# Altium PCB Buck_Converter.PcbDoc (part 2 of 2)
Units mm, origin at the board's own origin, x right, y up, seen from the top; angles counter-clockwise.
Board outline 33.25 x 45.75 mm, 2 copper layers (Top Layer, Bottom Layer); 30 components, 13 nets, 71 pads, 22 vias.
Unrouted connection lines stored in the file: 25.
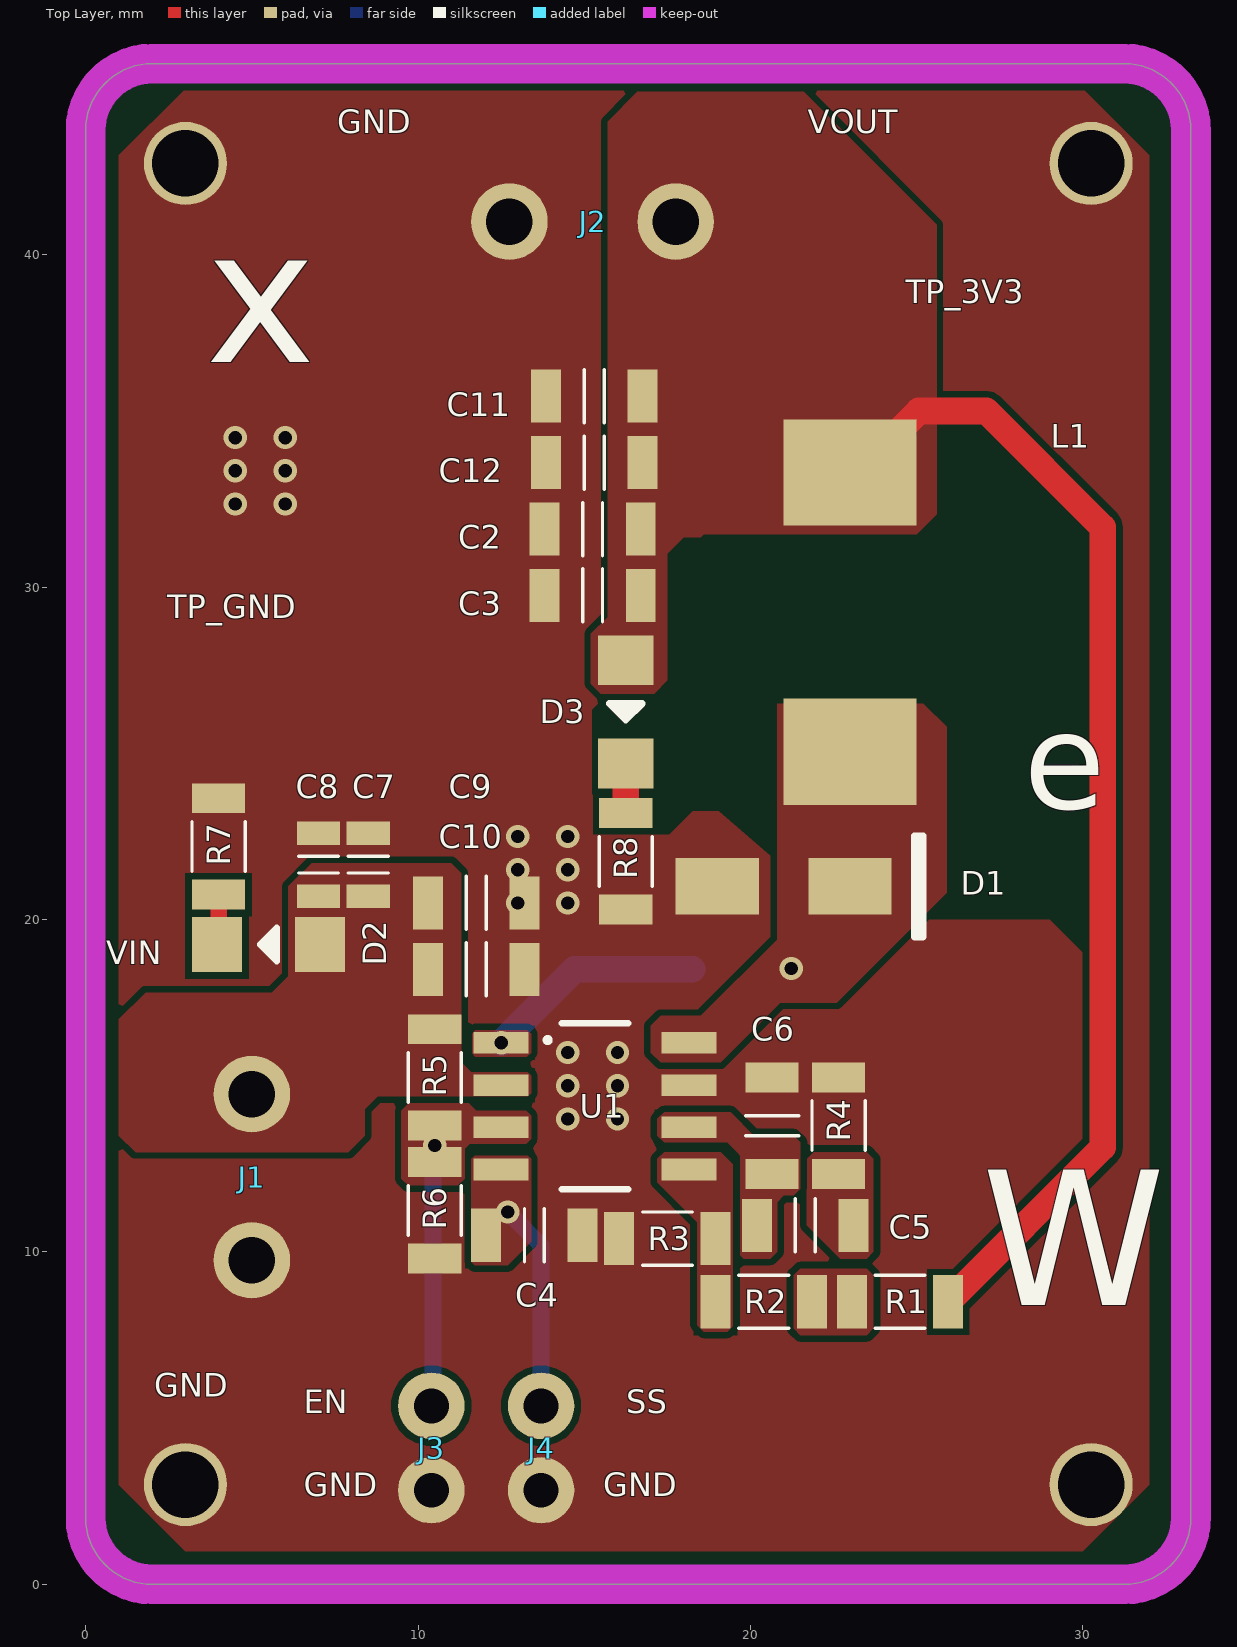
[diagram p0: Top Layer view]

## Part data (continued)
R5: library part "RES 100K OHM 1206 1/4W", "SMD Chip Resistor, 100 kOhm, ï¿½ 5%, 250 mW, 1206 [3216 Metric], Thick Film, General Purpose", Manufacturer=Yageo, Resistance=100kR, Supplier Part Number 1=9240764, Voltage Rating (AC)=200V, Category="Chip SMD Resistors", ComponentLink1Description=https://datasheet.ciiva.com/2458/pyu-rc1206-51-rohs-l-4-2458650.pdf?src-supplier=Digikey, ComponentLink1URL=https://datasheet.ciiva.com/2458/pyu-rc1206-51-rohs-l-4-2458650.pdf?src-supplier=Digikey, ComponentLink2Description=https://datasheet.ciiva.com/7857/444357-7857423.pdf?src-supplier=Element14, ComponentLink2URL=https://datasheet.ciiva.com/7857/444357-7857423.pdf?src-supplier=Element14, ComponentLink3Description=https://datasheet.ciiva.com/2458/pyu-rc1206-51-rohs-l-4-2458651.pdf?src-supplier=Digikey, ComponentLink3URL=https://datasheet.ciiva.com/2458/pyu-rc1206-51-rohs-l-4-2458651.pdf?src-supplier=Digikey, ComponentLink4Description=https://datasheet.ciiva.com/2458/pyu-rc1206-51-rohs-l-4-2458652.pdf?src-supplier=Digikey, ComponentLink4URL=https://datasheet.ciiva.com/2458/pyu-rc1206-51-rohs-l-4-2458652.pdf?src-supplier=Digikey, DesignedBy="Aslı Kurt", Lead Free=5697LeadFree, Manufacturer Part Number=RC1206JR-07100KL, Pricing 1="10=0,0133, 100=0,0123, 500=0,0111, 1000=0,0104, 2500=0,0095 (EUR)", Pricing 2="5000=0,0029, 25000=0,0027, 100000=0,0026, 250000=0,0026, 625000=0,0024 (USD)", Pricing 3="5000=0,00353, 10000=0,00345, 20000=0,00338, 30000=0,00331, 40000=0,00325 (USD)", Pricing 4="1=0,1, 10=0,014, 50=0,014, 100=0,013, 1000=0,011, 10000=0,004 (USD)", Pricing 5="5000=0,004 (USD)", RoHS=Yes, Stock 1=3980, Stock 2=470000, Stock 3=5000, Stock 4=41748, Stock 5=55000, Supplier 1=Farnell, Supplier 2="Future Electronics", Supplier 3=Avnet, Supplier 4=Mouser, Supplier 5=Newark, Supplier Part Number 2=4725842, Supplier Part Number 3=RC1206JR-07100KL, Supplier Part Number 4=603-RC1206JR-07100KL, Supplier Part Number 5=12AC2282
R6: library part "RES 47K OHM 1206 1/4W", "SMD Chip Resistor, 47 kOhm, ï¿½ 5%, 250 mW, 1206 [3216 Metric], Thick Film, General Purpose", Manufacturer=Yageo, Manufacturer Part Number=RC1206JR-0747KL, Resistance=47kR, Supplier Part Number 1=9240721, Voltage Rating (AC)=200V, Category="Chip SMD Resistors", ComponentLink1Description=https://datasheet.ciiva.com/29181/402745-da-01-en-smd-widerstand-chip1206-47-kohm-29181385.pdf?src-supplier=Conrad, ComponentLink1URL=https://datasheet.ciiva.com/29181/402745-da-01-en-smd-widerstand-chip1206-47-kohm-29181385.pdf?src-supplier=Conrad, ComponentLink2Description=https://datasheet.ciiva.com/2520/pyu-r-int-thick-7-2520698.pdf?src-supplier=Digikey, ComponentLink2URL=https://datasheet.ciiva.com/2520/pyu-r-int-thick-7-2520698.pdf?src-supplier=Digikey, ComponentLink3Description=https://datasheet.ciiva.com/2520/pyu-r-int-thick-7-2520699.pdf?src-supplier=Digikey, ComponentLink3URL=https://datasheet.ciiva.com/2520/pyu-r-int-thick-7-2520699.pdf?src-supplier=Digikey, ComponentLink4Description=https://datasheet.ciiva.com/2520/pyu-r-int-thick-7-2520700.pdf?src-supplier=Digikey, ComponentLink4URL=https://datasheet.ciiva.com/2520/pyu-r-int-thick-7-2520700.pdf?src-supplier=Digikey, ComponentLink5Description=https://datasheet.ciiva.com/16740/pyu-rc1206-51-rohs-l-4-16740793.pdf?src-supplier=Future+Electronics, ComponentLink5URL=https://datasheet.ciiva.com/16740/pyu-rc1206-51-rohs-l-4-16740793.pdf?src-supplier=Future+Electronics, DesignedBy="Aslı Kurt", Pricing 1="10=0,0143, 100=0,0133, 500=0,0114, 1000=0,0095, 2500=0,0093 (EUR)", Pricing 2="5000=0,00353, 30000=0,00331, 40000=0,00325 (USD)", Pricing 3="100=0,008, 1000=0,007, 2000=0,006 (GBP)", Pricing 4="1=0,005, 25=0,005, 50=0,005, 100=0,005, 250=0,005, 500=0,005, 1000=0,005 (USD)", RoHS=Yes, Stock 1=117, Stock 2=65000, Stock 3=4400, Stock 4=9045, Supplier 1=Farnell, Supplier 2=Avnet, Supplier 3=Rs, Supplier 4=Newark, Supplier Part Number 2=RC1206JR-0747KL, Supplier Part Number 3=2427219, Supplier Part Number 4=49AK3906
R7 R8: library part "RES 10K OHM 1206 1/4W", "RES 10K OHM 5% 1/4W 1206", Case Code (Metric)=3216, Case Code (Imperial)=1206, Manufacturer=Yageo, Max Operating Temperature=155°C, Max Power Dissipation=250mW, Min Operating Temperature=-55°C, Package Quantity=1, Resistance=10kR, Resistance Tolerance=5%, Resistor Type="Thick Film", Supplier Part Number 1=4750733, Temperature Coefficient=100ppm/°C, Voltage Rating=200V, Case/Package=1206, Category="Chip SMD Resistors", ComponentLink1Description=https://datasheet.ciiva.com/29154/402664-da-01-en-smd-widerstand-chip1206-10-kohm-29154546.pdf?src-supplier=Conrad, ComponentLink1URL=https://datasheet.ciiva.com/29154/402664-da-01-en-smd-widerstand-chip1206-10-kohm-29154546.pdf?src-supplier=Conrad, ComponentLink2Description=https://datasheet.ciiva.com/7983/444357-7983813.pdf?src-supplier=Element14, ComponentLink2URL=https://datasheet.ciiva.com/7983/444357-7983813.pdf?src-supplier=Element14, ComponentLink3Description=https://datasheet.ciiva.com/2458/pyu-rc1206-51-rohs-l-4-2458636.pdf?src-supplier=Digikey, ComponentLink3URL=https://datasheet.ciiva.com/2458/pyu-rc1206-51-rohs-l-4-2458636.pdf?src-supplier=Digikey, ComponentLink4Description=https://datasheet.ciiva.com/2458/pyu-rc1206-51-rohs-l-4-2458637.pdf?src-supplier=Digikey, ComponentLink4URL=https://datasheet.ciiva.com/2458/pyu-rc1206-51-rohs-l-4-2458637.pdf?src-supplier=Digikey, ComponentLink5Description=https://datasheet.ciiva.com/2458/pyu-rc1206-51-rohs-l-4-2458635.pdf?src-supplier=Digikey, ComponentLink5URL=https://datasheet.ciiva.com/2458/pyu-rc1206-51-rohs-l-4-2458635.pdf?src-supplier=Digikey, DesignedBy="Aslı Kurt", Height=0.026inch, Lead Free="Lead Free", Length=0.122inch, Manufacturer Part Number=RC1206JR-0710KL, Number of Terminations=2, Packaging="Cut Tape", Power Rating=250mW, Pricing 1="5000=0,0034, 20000=0,0033, 75000=0,0031, 200000=0,003, 500000=0,0029 (USD)", Pricing 2="1=0,1, 10=0,024, 50=0,022, 100=0,0194, 500=0,01224, 1000=0,0102 (USD)", Reach SVHC Compliant=Unknown, RoHS=Yes, RoHS Compliant=Yes, Series=RC1206, Stock 1=145000, Stock 2=179700, Supplier 1="Future Electronics", Supplier 2=Digikey, Supplier Part Number 2=311-10KERCT-ND, Termination=SMD/SMT, Tolerance=5%, Voltage Rating (AC)=200V, Width=0.063inch
U1: library part TPS54331DR, "3.5V to 28V Input, 3A, 570kHz Step-Down Converter with Eco-mode 8-SOIC -40 to 150", Case/Package=D, Manufacturer="Texas Instruments", Max Operating Temperature=150°C, Max Output Current=3A, Max Output Voltage=25V, Max Input Voltage=28V, Min Operating Temperature=-40°C, Min Output Voltage=800mV, Min Input Voltage=3.5V, Package Quantity=1, Quiescent Current=110uA, Supplier Part Number 1=296-26991-6-ND, Switching Frequency=570kHz, Category="Voltage Regulators - Switching", ComponentLink1Description=https://datasheet.ciiva.com/41462/001014850-da-01-en-ic-reg-buck-adj-3a-tps54331dr-soic-8-tid-41462698.pdf?src-supplier=Conrad, ComponentLink1URL=https://datasheet.ciiva.com/41462/001014850-da-01-en-ic-reg-buck-adj-3a-tps54331dr-soic-8-tid-41462698.pdf?src-supplier=Conrad, ComponentLink2Description=https://datasheet.ciiva.com/2034/tps54331-2034841.pdf?src-supplier=Digikey, ComponentLink2URL=https://datasheet.ciiva.com/2034/tps54331-2034841.pdf?src-supplier=Digikey, ComponentLink3Description=https://datasheet.ciiva.com/2034/tps54331-2034840.pdf?src-supplier=Digikey, ComponentLink3URL=https://datasheet.ciiva.com/2034/tps54331-2034840.pdf?src-supplier=Digikey, ComponentLink4Description=https://datasheet.ciiva.com/2034/tps54331-2034842.pdf?src-supplier=Digikey, ComponentLink4URL=https://datasheet.ciiva.com/2034/tps54331-2034842.pdf?src-supplier=Digikey, ComponentLink5Description=https://datasheet.ciiva.com/14303/tps54331-14303672.pdf?src-supplier=Avnet, ComponentLink5URL=https://datasheet.ciiva.com/14303/tps54331-14303672.pdf?src-supplier=Avnet, DesignedBy="Aslı Kurt", Height=1.5mm, Lead Free="Lead Free", Length=5mm, Manufacturer Part Number=TPS54331DR, Number of Channels=1NUMBER, Number of Outputs=1, Number of Pins=8, Operating Supply Voltage=28V, Output Configuration=Positive, Output Current=3A, Output Type=Adjustable, Output Voltage=25V, Packaging="Tape and Reel", Pricing 1="1=1,87, 10=1,322, 25=1,1864, 100=1,0368, 250=0,96548, 500=0,92248, 1000=0,88708 (USD)", Radiation Hardening=No, Reach SVHC Compliant=No, RoHS=Yes, RoHS Compliant=Yes, Series=Eco-Mode™, Stock 1=4154, Supplier 1=Digikey, Synchronous Rectifier=No, Thickness=1.58mm, Weight=0.002561oz, Width=4mm

## Free pads (board coordinates)
  round 2.5 hole 2 mask+0.05: ""(3,3) ""(3,42.75) ""(30.25,3) ""(30.25,42.75)

## Via types
v1: diameter 0.7, hole 0.4, Top Layer to Bottom Layer, tented both sides, 22 vias

## Nets (pads, with @x,y where several pads share a name; then routed paths per layer and width w, separated by ;. In a path a pad name is that pad's centre, name@x,y a point inside that pad or via, vN(x,y) a via of type N, cw(c..) or ccw(c..) an arc to the next point about the centre after c; other vN are vias at no path point)
3V3: C2.2 C3.2 C11.2 C12.2 D3.2 J2.2 L1.2 R1.2 | length 35.1
  Top Layer w0.8: L1.2 23.4,33.45 24.6,34.65 24.6,34.831 25.069,35.3 27.1,35.3 30.6,31.8 30.6,13.15 R1.2
COMP: C5.2 C6.2 U1.6
ENABLE: D4.3 J3.2 R5.1 R6.2 U1.3 | length 7.9
  Bottom Layer w0.5: J3.2 10.45,5.42 10.45,13.15 v1(10.5,13.2)
GND: C2.1 C3.1 C4.1 C6.1 C7.1 C8.1 C9.1 C10.1 C11.1 C12.1 D1.1 D4.1 J1.1 J2.1 J3.1 J4.1 pad. R3.1 R4.1 R6.1 R7.1 R8.1 U1.7
  other v1: 14.5,14 16,14 14.5,15 16,15 14.5,16 16,16 13,20.5 14.5,20.5 13,21.5 14.5,21.5 13,22.5 14.5,22.5 4.5,32.5 6,32.5 4.5,33.5 6,33.5 4.5,34.5 6,34.5
NetC1_1: C1.1 U1.1 | length 6.7
  Bottom Layer w0.8: v1(12.5,16.29) 14.71,18.5 C1.1
NetC1_2: C1.2 D1.2 L1.1 U1.8
  other v1: 21.225,18.525
NetC5_1: C5.1 R4.2
NetD2_1: D2.1 R7.2 | length 1.5
  Top Layer w0.5: D2.1 4,19.3 R7.2
NetD3_1: D3.1 R8.2 | length 1.5
  Top Layer w0.8: R8.2 D3.1
NetR1_1: R1.1 R2.2
SS: C4.2 J4.2 U1.4 | length 6.2
  Bottom Layer w0.5: v1(12.7,11.2) 13.7,10.2 J4.2
VCC: C7.2 C8.2 C9.2 C10.2 D2.2 J1.2 R5.2 U1.2
VSENSE: R2.1 R3.2 U1.5
pads on no net: D4.2

## Polygon pours and split planes (outlines as drawn)
GND on Top Layer "GND_L01_P016" (solid, remove dead copper, pour order 16): 3,45 1,43 1,3 3,1 30,1 32,3 32,43 30,45
NetC1_2 on Top Layer "NETC1_2_L01_P013" (solid, pour order 13): 20.8,26.5 21.2,26.9 24.8,26.9 25.9,25.8 25.9,20.8 22.6,17.5 20.9,17.5 19.1,15.7 17.3,15.7 17,16 17,16.8 17.3,17.1 18.5,17.1 20.8,19.4
3V3 on Top Layer "3V3_L01_P008" (solid, pour order 8): 15.2,27.1 15.5,26.8 17.1,26.8 17.8,27.5 17.8,30.8 18.6,31.6 25,31.6 25.6,32.2 25.6,40.9 21.6,44.9 16.6,44.9 15.7,44 15.7,29.1 15.2,28.6
NetC1_1 on Top Layer "NETC1_1_L01_P010" (solid, remove dead copper, pour order 10): 11.725,16.669 13.292,16.669 13.4,16.561 13.4,16 13.274,15.874 11.726,15.874 11.623,15.977 11.623,16.567
VCC on Top Layer "VCC_L01_P007" (solid, pour order 7): 6.1,21 6.1,18.3 5.6,17.8 1.8,17.8 1,17 1,13.5 1.5,13 7.9,13 8.4,13.5 8.4,14.3 8.783,14.683 13.318,14.683 13.4,14.765 13.4,15.3 13.3,15.4 11.6,15.4 11.3,15.7 11.3,21.4 11,21.7 6.8,21.7
NetC5_1 on Top Layer "NETC5_1_L01_P006" (solid, pour order 6): 21.9,13 21.7,12.8 21.7,10.8 22.7,9.8 23.5,9.8 23.7,10 23.7,12.8 23.5,13
NetR1_1 on Top Layer "NETR1_1_L01_P005" (solid, pour order 5): 21.5,9.5 21.3,9.3 21.3,7.7 21.5,7.5 23.5,7.5 23.7,7.7 23.7,9.3 23.5,9.5
ENABLE on Top Layer "ENABLE_L01_P000" (solid, pour order 0): 13.25,14.25 13.4,14.1 13.4,13.4 13.25,13.25 11.55,13.25 11.4,13.1 11.4,12.2 11.2,12 9.7,12 9.5,12.2 9.5,14.25 9.726,14.476 11.524,14.476 11.75,14.25
VSENSE on Top Layer "VSENSE_L01_P004" (solid, pour order 4): 17.4,13 17.2,12.8 17.2,12.1 18.4,10.9 18.4,7.8 18.6,7.6 19.3,7.6 19.468,7.768 19.468,12.632 19.1,13
COMP on Top Layer "COMP_L01_P003" (solid, pour order 3): 17.4,14.2 17.2,14 17.2,13.5 17.4,13.3 19.3,13.3 19.6,13 19.7,12.9 19.7,9.9 19.8,9.8 20.6,9.8 20.8,10 20.8,11.5 21,11.7 21.3,11.7 21.5,11.9 21.5,13.3 21.3,13.5 20.1,13.5 19.4,14.2
SS on Top Layer "SS_L01_P001" (solid, pour order 1): 11.7,12.9 11.6,12.8 11.6,9.7 11.7,9.6 12.7,9.6 13.4,10.3 13.4,12.8 13.3,12.9
GND on Bottom Layer "GND_L02_P015" (solid, remove dead copper, pour order 15): 3,45 1,43 1,3 3,1 30,1 32,3 32,43 30,45
NetC1_1 on Bottom Layer "NETC1_1_L02_P012" (solid, remove dead copper, pour order 12): 11.669,16.669 13.378,16.669 13.378,15.978 13.274,15.874 11.726,15.874 11.623,15.977 11.623,16.623
NetC1_2 on Bottom Layer "NETC1_2_L02_P009" (solid, pour order 9): 20.7,19.3 21.6,19.3 21.6,17.7 20.7,17.7
ENABLE on Bottom Layer "ENABLE_L02_P002" (solid, pour order 2): 13.225,14.225 13.475,13.975 13.475,13.475 13.225,13.225 11.525,13.225 11.375,13.075 11.375,12.175 11.175,11.975 9.675,11.975 9.475,12.175 9.475,14.225 9.725,14.475 11.475,14.475 11.725,14.225

## Keep-outs
Keep-Out Layer:
  the board outline again, w1.2

## Other copper
Top Layer:
  pour cut-out: 25.2,26.5 26,25.7 26,23 30,23 30,26.5
  pour cut-out: 17.5,24.606 17.5,22.6 17.55,22.55 18.261,23.261 19.048,23.261 17.703,24.606
  pour cut-out: 17.5,26.5 20.596,26.5 20.596,21.917 17.5,24.606
  pour cut-out: 30,19 26,23 30,23
  pour cut-out: 17.5,26.934 17.163,26.596 15.5,26.596 15.22,26.316 15.22,25.65 17.28,25.65 17.25,25.62 17.25,22.55 17.55,22.55 18,23 17.5,23.5
  pour cut-out: 18,31.5 28,31.5 30,29.5 30,26.5 17.5,26.5 17.5,31
  pour cut-out: 26,23 29,20 25.5,20 26,20.5
Bottom Layer:
  pour cut-out: 18.032,35 27.967,35 28,34.967 28,23.073 27.927,23 18.037,23 18,23.037 18,34.968

## Silkscreen, mask and mechanical layers (free items; w line width, h text height)
Top Overlay:
  circle w0.254: c13.9,16.375 r0.025
  text "GND" at 7.567,43.65 h0.7
  text "VOUT" at 21.717,43.65 h0.7
  text "TP_3V3" at 24.675,38.542 h0.7
  text "x" at 3.615,35.434 h7
  text "TP_GND" at 2.45,29.067 h0.7
  text "e" at 28.225,22.368 h5
  text "VIN" at 0.625,18.65 h0.7
  text "W" at 26.962,7.062 h7
  text "GND" at 2.067,5.65 h0.7
  text "EN" at 6.567,5.15 h0.7
  text "SS" at 16.267,5.15 h0.7
  text "GND" at 6.567,2.65 h0.7
  text "GND" at 15.567,2.65 h0.7
Bottom Overlay:
  drawing of 10 lines, arcs and shapes, not listed
  text "OUT: 3V3 - 3A" at 20.698,35.58 h2
  text "DC-DC Asynchronous Step-Down Converter" at 29.986,35.469 h1.5 r90
  text "IN: 5V-28V" at 11.246,20.455 h2
  text "v1.2" at 31.408,11.349 h1.5 r90
Top Solder:
  circle w1.4: c3.75,27.5 r0.1
  circle w1.4: c23,39 r0.1
Drill Drawing:
  the board outline again, w0.2